# EAGLE board pin rotation - usb2serial6 (EAGLE 7.2.0)
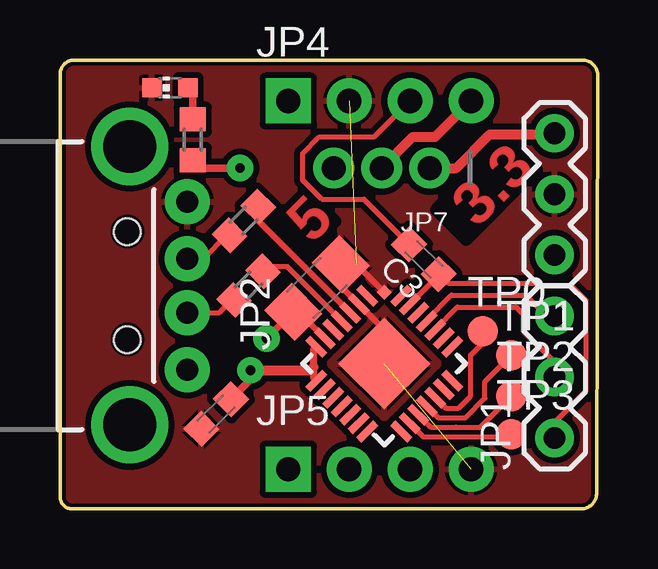
[diagram p0: board, top side]
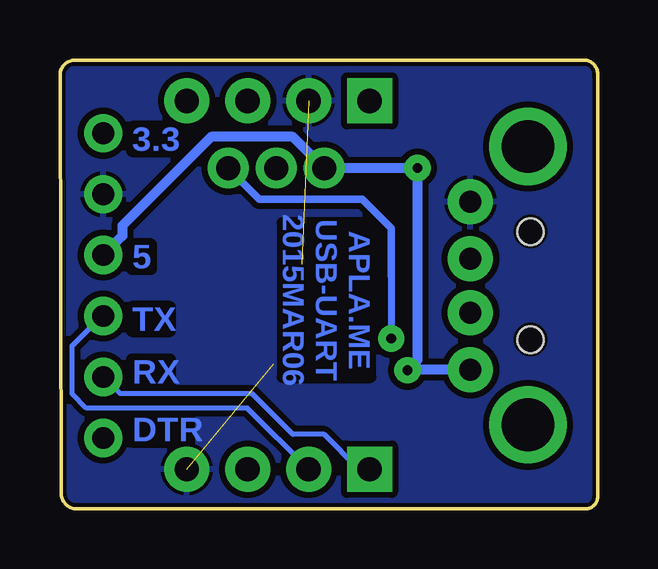
[diagram p1: board, bottom side, seen from below]

Size 22.41 x 18.7 mm. Coordinates in mm from the lower left corner, seen from the top.
Outline: 22.41,18.1 arc90 21.71,18.7 0.51,18.7 arc90 0.01,18 0.01,0.5 arc90 0.51,0 21.66,0 arc90 22.36,0.6 22.41,18.1
Copper layers (1*16): Top 0.018mm / dielectric 1.5mm / Bottom 0.018mm
Design rules "es-015mm *": minimum track width 0.15mm, minimum drill 0.4mm, track to track 0.12mm, track to pad 0.12mm, pad to pad 0.12mm, via to via 0.12mm, smd to smd 0.12mm, copper to edge 0.15mm, drill to drill 0.15mm, minimum pad ring 0.35mm, minimum via ring 0.35mm, stop-mask expansion 0mil, vias tented up to drill 25mil, thermal gap 0.15mm
Net classes: 0 default: width 0.2 mm, drill 0.2 mm, clearance 0.2 mm; 1 power: width 0.254 mm, drill 0.254 mm, clearance 0.254 mm

## Footprints (pad centres in the part's own frame; a part is rotated, then mirrored left to right if it is on the bottom)
C1206 = smd 1.6 x 1.8: 1 -1.4,0; 2 1.4,0
C0603K = smd 1.05 x 1.08: 1 -0.875,0; 2 0.875,0
MLP28 = smd 1 x 0.3: 1 -2.5,1.5; 2 -2.5,1; 3 -2.5,0.5; 4 -2.5,0; 5 -2.5,-0.5; 6 -2.5,-1; 7 -2.5,-1.5; 15 2.5,-1.5; 16 2.5,-1; 17 2.5,-0.5; 18 2.5,0; 19 2.5,0.5; 20 2.5,1; 21 2.5,1.5 | smd 0.3 x 1: 8 -1.5,-2.5; 9 -1,-2.5; 10 -0.5,-2.5; 11 0,-2.5; 12 0.5,-2.5; 13 1,-2.5; 14 1.5,-2.5; 22 1.5,2.5; 23 1,2.5; 24 0.5,2.5; 25 0,2.5; 26 -0.5,2.5; 27 -1,2.5; 28 -1.5,2.5 | smd 2.7 x 2.7: EXP 0,0 | smd 0.435 x 0.435: M -2.103,2.103
1X03 = drill 0.9: 1 0,0; 2 2.54,0; 3 5.08,0
USB-A-H = drill 0.914 pad 1.88: D+ 2.4,1.127; D- 2.4,-1.127; GND 2.4,3.5; VBUS 2.4,-3.5 | drill 2.2: GND2 0,-5.8; GND3 0,5.8 | hole 1.1: -0.1,2.25; -0.1,-2.25
1X04_NO_SILK = drill 1.016 pad 1.88 square: 1 0,0 | drill 1.016 pad 1.88: 2 2.54,0; 3 5.08,0; 4 7.62,0
1X03_2MM = drill 1 pad 1.5: 1 -0.094,0; 2 1.906,0; 3 3.906,0
CHIP-LED0603 = smd 0.8 x 0.8: A 0,-0.75; C 0,0.75
R0603 = smd 1 x 1.1: 1 -0.85,0; 2 0.85,0
B1,27 = smd 1.27 x 1.27: TP 0,0

## Placement (x,y rotation side)
C1  10uF  [C1206]  10.71,9.2 225 top
C2  1uF  [C0603K]  6.51,3.95 45 top
C3  [C0603K]  15.16,10.4 135 top
IC1  CP2103_USB_UART  [MLP28]  13.51,6.05 315 top
JP1  [1X03]  20.61,2.95 90 top
JP2  USB-A-H  [USB-A-H]  2.91,9.3 0 top
JP3  [1X03]  20.61,15.65 270 top
JP4  [1X04_NO_SILK]  9.51,17 0 top
JP5  [1X04_NO_SILK]  9.51,1.65 0 top
JP7  [1X03_2MM]  15.31,14.2 180 top
LED1  [CHIP-LED0603]  4.58,17.55 90 top
R1  22  [R0603]  7.66,12 45 top
R2  22  [R0603]  7.86,9.3 45 top
R4  470  [R0603]  5.53,15.38 90 top
TP0  TPB1,27  [B1,27]  17.61,7.4 0 top
TP1  TPB1,27  [B1,27]  18.81,6.4 0 top
TP2  TPB1,27  [B1,27]  18.81,4.7 0 top
TP3  TPB1,27  [B1,27]  18.81,3.1 0 top

## Library data of the parts
C1-C3 R1 R2 R4 = resistor
IC1 = SparkFun-DigitalIC
JP1 JP3 = SparkFun_20110922_my
JP2 JP4 JP5 = SparkFun-Connectors
JP7 = microbuilder
LED1 = led
TP0 TP1-TP3 = testpad

## Nets
DTR: C3.1 IC1.27 JP1.1
GND [power]: C2.2 IC1.7 IC1.8 JP2.VBUS JP3.3 JP7.3 R4.1
IO0: IC1.19 TP0.TP
IO1: IC1.18 TP1.TP
IO2: IC1.17 TP2.TP
IO3: IC1.16 TP3.TP
N$3: IC1.3 R1.2
N$6: IC1.4 R2.2
N$10: LED1.A R4.2
N$111 [power]: C1.1 C2.1 IC1.2 IC1.EXP IC1.M JP2.GND JP3.2 JP4.2 JP5.4 LED1.C
RAW: JP4.1
RST: C3.2 JP4.3
RXD: IC1.24 JP1.2 JP5.1
TXD: IC1.25 JP1.3 JP5.2
USBD+: JP2.D+ R1.1
USBD-: JP2.D- R2.1
VCC [power]: JP4.4 JP7.2
VCC3.3 [power]: C1.2 IC1.6 JP3.1 JP7.1
VIO: IC1.5

## Tracks (layer width: path | path; a pad name or v marks a point on that pad's centre or on a via)
DTR
  Top 0.203: IC1.27 15.78,9.73 C3.1 15.81,9.78 16.19,9.4 19.81,9.4 19.91,9.3 21.31,9.3 21.91,8.7 21.91,4.9 20.61,3.6 JP1.1
GND  (via drill 0.4)
  Top 0.3: IC1.8 10.56,5.47 10.56,5.9 10.56,6.64 IC1.7
  Top 0.305: C2.2 7.93,5.38 v7.93,5.78 | R4.1 5.86,14.2 v7.51,14.2
  Top 0.406: v7.93,5.78 10.43,5.78 10.56,5.9
  Bottom 0.305: JP7.3
  Bottom 0.406: JP7.3 12.71,15.5 16.11,15.5 19.81,11.8 19.81,11.37 JP3.3 | JP2.VBUS 7.91,5.8 | 7.91,5.8 7.51,6.2 v7.51,14.2 JP7.3 | v7.93,5.78 7.91,5.8
IO0
  Top 0.203: IC1.19 16.07,4.2 16.61,4.2 17.11,4.7 17.11,6.4 17.61,6.9 TP0.TP
IO1
  Top 0.203: IC1.18 15.76,3.8 16.91,3.8 17.71,4.6 17.71,5.3 TP1.TP
IO2
  Top 0.2: IC1.17 15.45,3.4 16.51,3.4
  Top 0.203: 16.51,3.4 17.51,3.4 TP2.TP
IO3
  Top 0.2: IC1.16 15.14,3 15.91,3
  Top 0.203: 15.91,3 18.71,3 TP3.TP
N$3
  Top 0.203: 8.26,12.01 R1.2
  Top 0.22: IC1.3 8.26,12.01
N$6
  Top 0.2: IC1.4 9.46,10.1
  Top 0.203: R2.2 8.66,10.1 9.46,10.1
N$10
  Top 0.2: 5.31,17.53 LED1.A
  Top 0.305: 5.31,17.53 5.53,17.3 R4.2
N$111  (2 unrouted)
  Top 0.254: IC1.EXP 13.51,7.47 IC1.2 11.7,9.28 C1.1 12.34,10.19 IC1.M
  pour Bottom: -0.39,19 -0.39,-0.4 27.11,-0.4 27.11,19
  pour Top: -0.39,18.8 -0.39,-0.4 27.11,-0.4 27.11,19 -0.39,19
RST
  Top 0.203: C3.2 12.66,12.9 10.91,12.9 10.11,13.7 10.11,14.8 10.81,15.5 13.09,15.5 JP4.3
RXD
  Top 0.2: IC1.24
  Top 0.203: IC1.24 16.56,8.4 19.01,8.4 19.31,8.1 19.31,7.4 20.61,6.1 JP1.2
  Bottom 0.203: JP1.2 19.91,4.8 14.41,4.8 12.71,3.1 11.41,3.1 9.96,1.65 JP5.1
TXD
  Top 0.2: IC1.25 15.28,7.87
  Top 0.203: 15.28,7.87 16.31,8.9 19.41,8.9 20.28,8.03 JP1.3
  Bottom 0.203: JP5.2 14.6,4.2 21.31,4.2 21.91,4.8 21.91,6.8 20.68,8.03 JP1.3
USBD+
  Top 0.2: JP2.D+ 5.99,10.43
  Top 0.203: 5.99,10.43 6.96,11.4 R1.1
USBD-
  Top 0.2: JP2.D- 6.63,8.17
  Top 0.203: 6.63,8.17 7.16,8.7 R2.1
VCC
  Top 0.406: JP7.2 14.7,15.5 15.63,15.5 JP4.4
VCC3.3  (via drill 0.4)
  Top 0.203: IC1.6 11,7.11
  Top 0.254: C1.2 9.93,8.21 IC1.6
  Top 0.3: v8.61,7.1 C1.2
  Top 0.406: JP7.1 16.51,14.2 17.91,15.6 20.56,15.6 JP3.1
  Bottom 0.3: 8.61,9.7 v8.61,7.1
  Bottom 0.305: 8.61,9.7 8.61,11.7 9.81,12.9 14.1,12.9 JP7.1

## Text on the board
Top: 3.3 | 5
Bottom: 3.3 | 5 | APLA.ME / USB-UART / 2015MAR06 | TX | RX | DTR